# EAGLE board ATtinyBoard_2 (EAGLE 6.4)
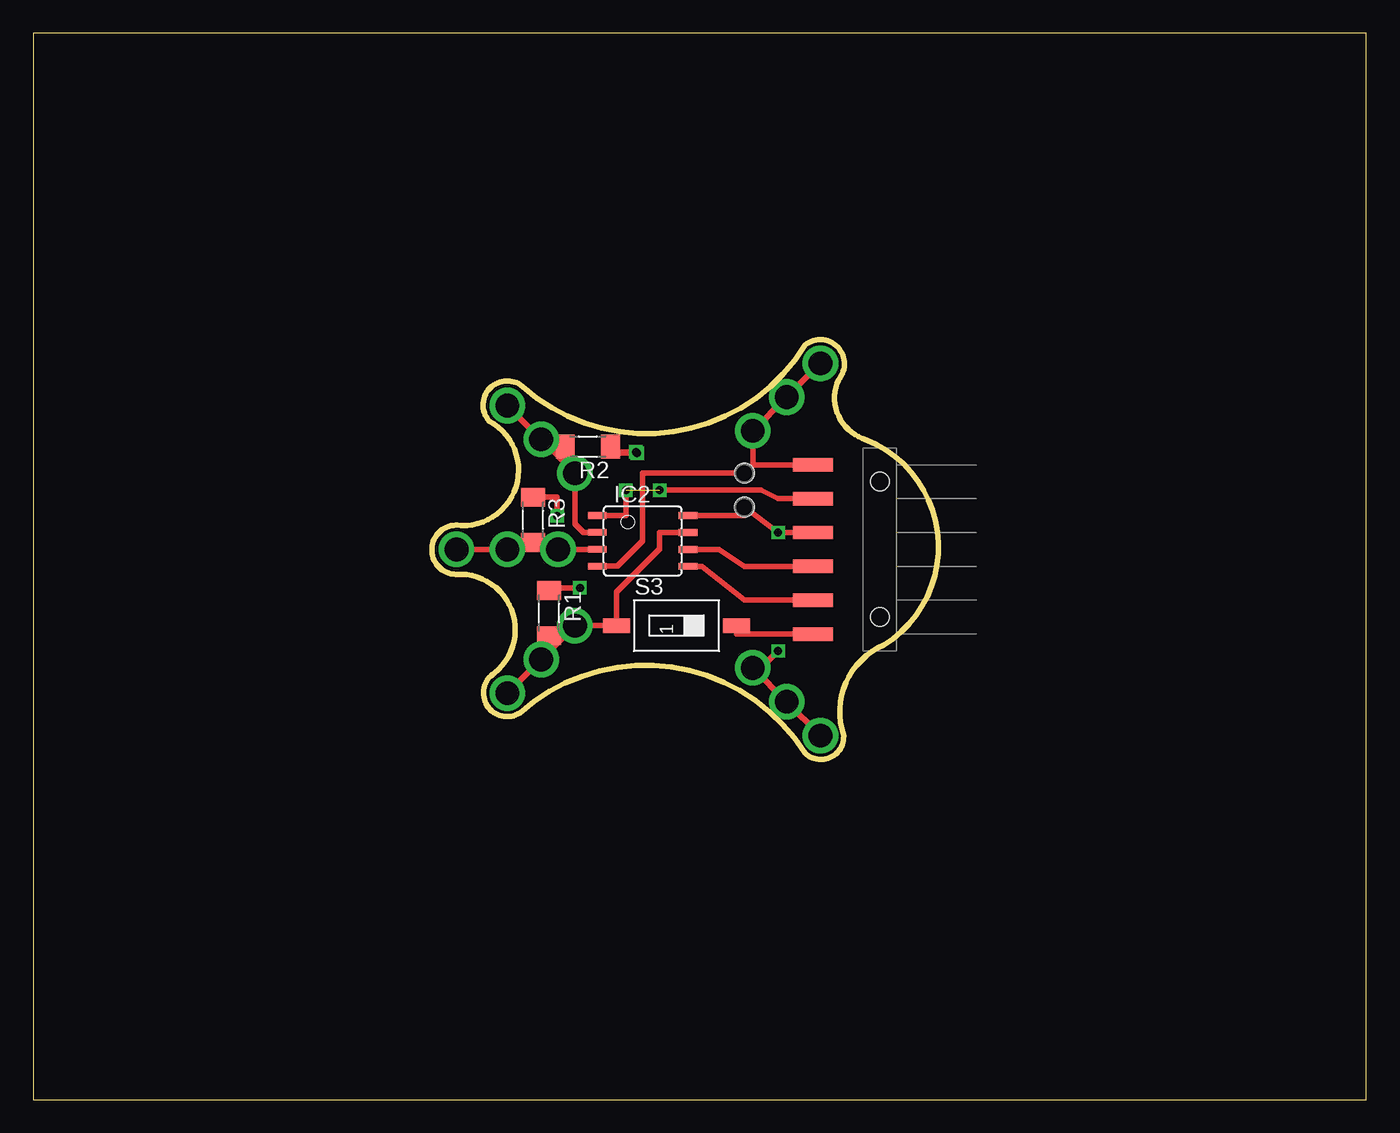
[diagram p0: board, top side]
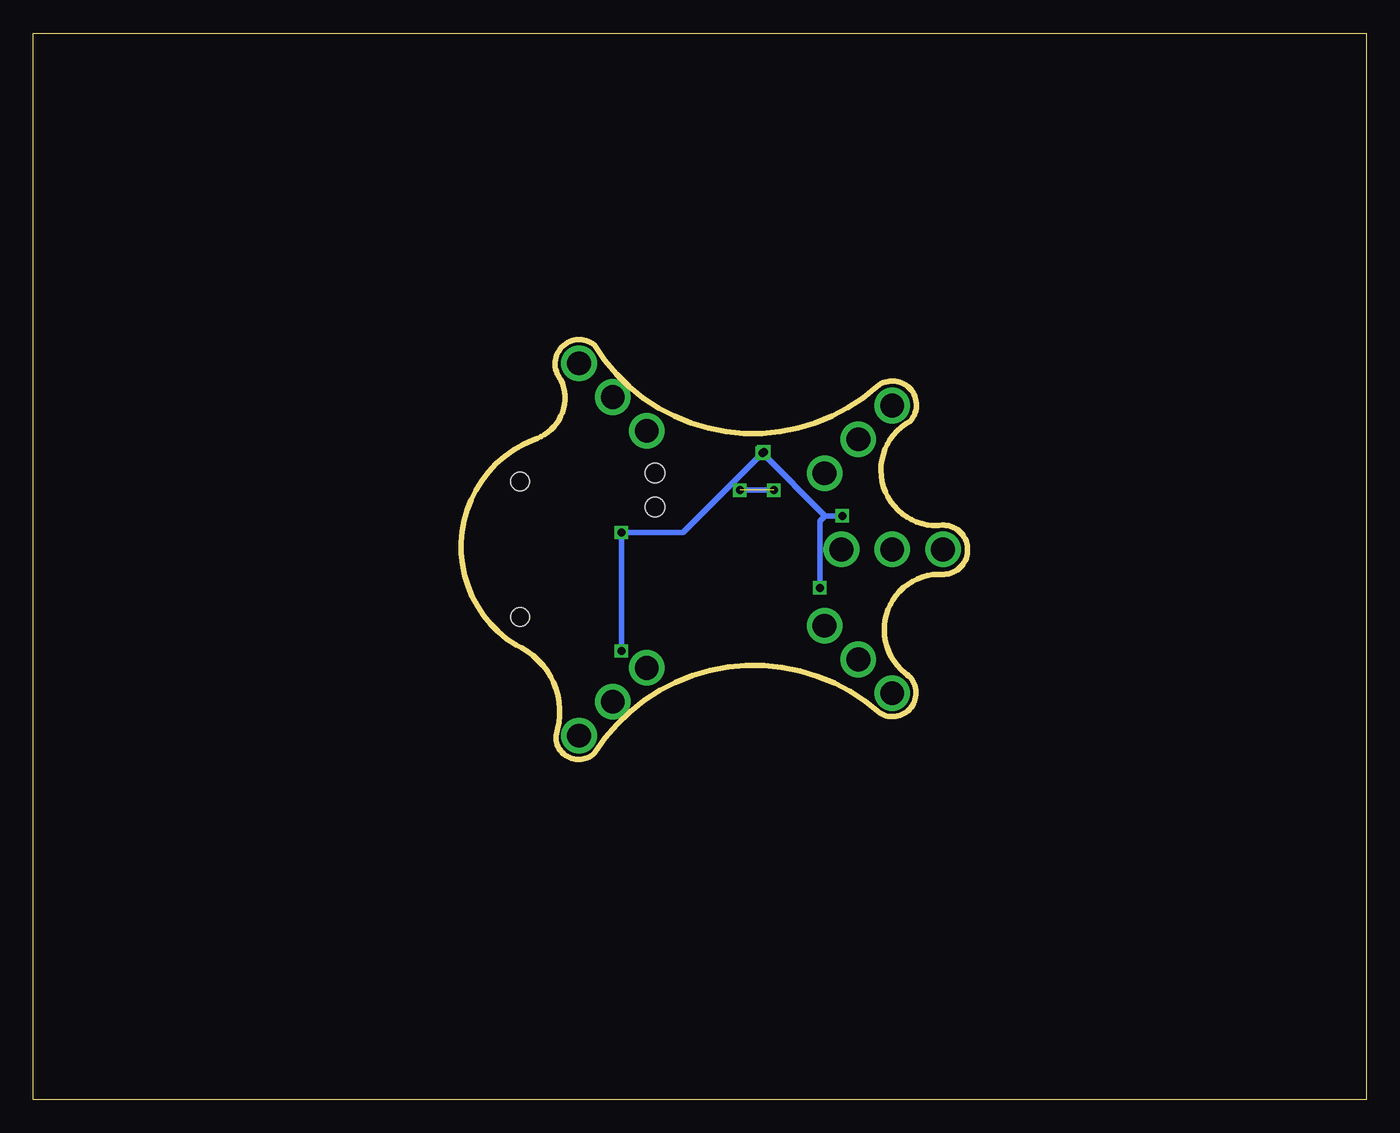
[diagram p1: board, bottom side, seen from below]

Size 100 x 80 mm. Coordinates in mm from the lower left corner, seen from the top.
Outline: 0,0 100,0 100,80 0,80 0,0
Copper layers (1*16): Top 0.035mm / dielectric 1.5mm / Bottom 0.035mm
Design rules "default": minimum track width 10mil, minimum drill 24mil, track to track 8mil, track to pad 8mil, pad to pad 8mil, via to via 8mil, smd to smd 8mil, copper to edge 40mil, drill to drill 8mil, minimum pad ring 10mil, minimum via ring 8mil, stop-mask expansion 4mil, vias tented up to drill 0mil, thermal gap 10mil
Milling: 13 lines

## Footprints (pad centres in the part's own frame; a part is rotated, then mirrored left to right if it is on the bottom)
SIMPLE_HOLE_SM = drill 1.778 pad 2.286: P$1 0,0
8S2 = smd 0.5 x 1.4: 1 -1.905,-3.404; 2 -0.645,-3.404; 3 0.625,-3.404; 4 1.895,-3.404; 5 1.905,3.404; 6 0.635,3.404; 7 -0.635,3.404; 8 -1.905,3.404
1X06-SMD = smd 1 x 3: 1 -6.35,5; 2 -3.81,5; 3 -1.27,5; 4 1.27,5; 5 3.81,5; 6 6.35,5 | hole 1.4: -5.08,0; 5.08,0
1X02_PP_HOLES_ONLY = drill 0.889 pad 0.813: 1 0,0; 2 2.54,0 | hole 1.473: 0,0; 2.54,0
M1406 = smd 1.4 x 1.8: 1 -1.7,0; 2 1.7,0
SMS-001 = smd 1.092 x 2.007: 1 0,-4.496; 2 0,4.496

## Placement (x,y rotation side)
H1  SEW_HOLE-SMALL  [SIMPLE_HOLE_SM]  38.1,33.02 0 top
H2  SEW_HOLE-SMALL  [SIMPLE_HOLE_SM]  38.1,49.53 0 top
H3  SEW_HOLE-SMALL  [SIMPLE_HOLE_SM]  35.56,41.27 0 top
H4  SEW_HOLE-SMALL  [SIMPLE_HOLE_SM]  56.52,52.7 0 top
H5  SEW_HOLE-SMALL  [SIMPLE_HOLE_SM]  53.98,32.38 0 top
H6  SEW_HOLE-SMALL  [SIMPLE_HOLE_SM]  56.52,29.84 0 top
H7  SEW_HOLE-SMALL  [SIMPLE_HOLE_SM]  59.05,27.3 0 top
H8  SEW_HOLE-SMALL  [SIMPLE_HOLE_SM]  31.75,41.27 0 top
H9  SEW_HOLE-SMALL  [SIMPLE_HOLE_SM]  39.37,41.27 0 top
H10  SEW_HOLE-SMALL  [SIMPLE_HOLE_SM]  35.56,52.07 0 top
H11  SEW_HOLE-SMALL  [SIMPLE_HOLE_SM]  40.64,46.99 0 top
H12  SEW_HOLE-SMALL  [SIMPLE_HOLE_SM]  35.56,30.48 0 top
H13  SEW_HOLE-SMALL  [SIMPLE_HOLE_SM]  40.64,35.56 0 top
H14  SEW_HOLE-SMALL  [SIMPLE_HOLE_SM]  59.05,55.24 0 top
H15  SEW_HOLE-SMALL  [SIMPLE_HOLE_SM]  53.98,50.16 0 top
IC2  TINY13-20SU  [8S2]  45.72,41.91 270 top
ISP/FTDI-CONNECTOR  [1X06-SMD]  63.5,41.27 90 top
JP2  M02POGO_PIN_HOLES_ONLY  [1X02_PP_HOLES_ONLY]  53.34,46.99 270 top
R1  [M1406]  38.7,36.5 270 top
R2  [M1406]  41.6,49 180 top
R3  [M1406]  37.5,43.5 270 top
S3  SWS001  [SMS-001]  48.26,35.56 270 top

## Library data of the parts
H1-H15 = LilyPad-Wearables
IC2 = atmel; MPN: ATTINY13-20SU; OC_FARNELL: 9171568; OC_NEWARK: 96K6522
ISP/FTDI-CONNECTOR JP2 = SparkFun-Connectors
R1-R3 = resistor
S3 = smd-special

## Nets
GND: H4.P$1 H14.P$1 H15.P$1 IC2.4 ISP/FTDI-CONNECTOR.6 JP2.1
N$1: IC2.5 ISP/FTDI-CONNECTOR.2
N$3: IC2.1 ISP/FTDI-CONNECTOR.5
N$4: IC2.6 ISP/FTDI-CONNECTOR.3
N$5: ISP/FTDI-CONNECTOR.1 S3.2
PB2: H1.P$1 H12.P$1 H13.P$1 IC2.7 R1.2 S3.1
PB3: H2.P$1 H10.P$1 H11.P$1 IC2.2 R2.2
PB4: H3.P$1 H8.P$1 H9.P$1 IC2.3 R3.2
VCC: H5.P$1 H6.P$1 H7.P$1 IC2.8 ISP/FTDI-CONNECTOR.4 JP2.2 R1.1 R2.1 R3.1

## Tracks (layer width: path | path; a pad name or v marks a point on that pad's centre or on a via)
GND
  Top 0.406: IC2.4 43.83,40.02 45.72,41.91 45.72,46.99 JP2.1 53.98,47.62 | 53.98,47.62 ISP/FTDI-CONNECTOR.6 | 53.98,47.62 H15.P$1 H4.P$1 H14.P$1
N$1
  Top 0.406: IC2.5 50.16,40.01 53.34,37.47 ISP/FTDI-CONNECTOR.2
N$3  (via drill 0.6)
  Top 0.406: ISP/FTDI-CONNECTOR.5 55.88,45.09 54.61,45.72 v46.99,45.72 | IC2.1 44.45,43.81 v44.45,45.72
  Bottom 0.406: v44.45,45.72 v46.99,45.72
N$4
  Top 0.406: IC2.6 51.44,41.27 53.34,40.01 ISP/FTDI-CONNECTOR.3
N$5
  Top 0.406: S3.2 52.76,34.92 ISP/FTDI-CONNECTOR.1
N$12  (via drill 0.6)
  other vias: 41,38.4
N$13  (via drill 0.6)
  other vias: 39.3,43.8
N$14  (via drill 0.6)
  other vias: 45.2,48.6
PB2
  Top 0.406: IC2.7 46.99,42.55 46.99,41.27 46.94,41.27 43.76,38.1 S3.1 H13.P$1 39.14,34.06 | 39.14,34.06 H1.P$1 H12.P$1 | R1.2 39.14,34.8 39.14,34.06
PB3
  Top 0.406: IC2.2 41.27,42.55 40.64,43.18 H11.P$1 39.37,48.27 | 39.37,48.27 H2.P$1 H10.P$1 | R2.2 39.37,49 39.37,48.27
PB4
  Top 0.406: IC2.3 H3.P$1 H8.P$1 37.5,41.27 | 37.5,41.27 H9.P$1 | R3.2 37.5,41.27
S$1  (via drill 0.6)  (1 unrouted)
  other vias: 46.99,45.72 44.45,45.72
VCC  (via drill 0.6)
  Top 0.406: IC2.8 53.34,43.81 JP2.2 v55.88,42.55 ISP/FTDI-CONNECTOR.4 | v55.88,33.66 54.61,32.38 H5.P$1 H6.P$1 H7.P$1 | v45.2,48.6 43.7,48.6 R2.1 43.8,48.5 v45.3,48.5 | v39.3,43.8 39.3,45.2 R3.1 | R1.1 38.7,38.4 v41,38.4
  Bottom 0.406: v55.88,33.66 v55.88,42.55 51.26,42.55 v45.3,48.5 | v45.2,48.6 v45.3,48.5 | v45.3,48.5 40.6,43.8 | 40.6,43.8 v39.3,43.8 | v41,38.4 41,43.4 40.6,43.8